# EAGLE board nanaPanelA (EAGLE 9.6.2), part 1 of 2
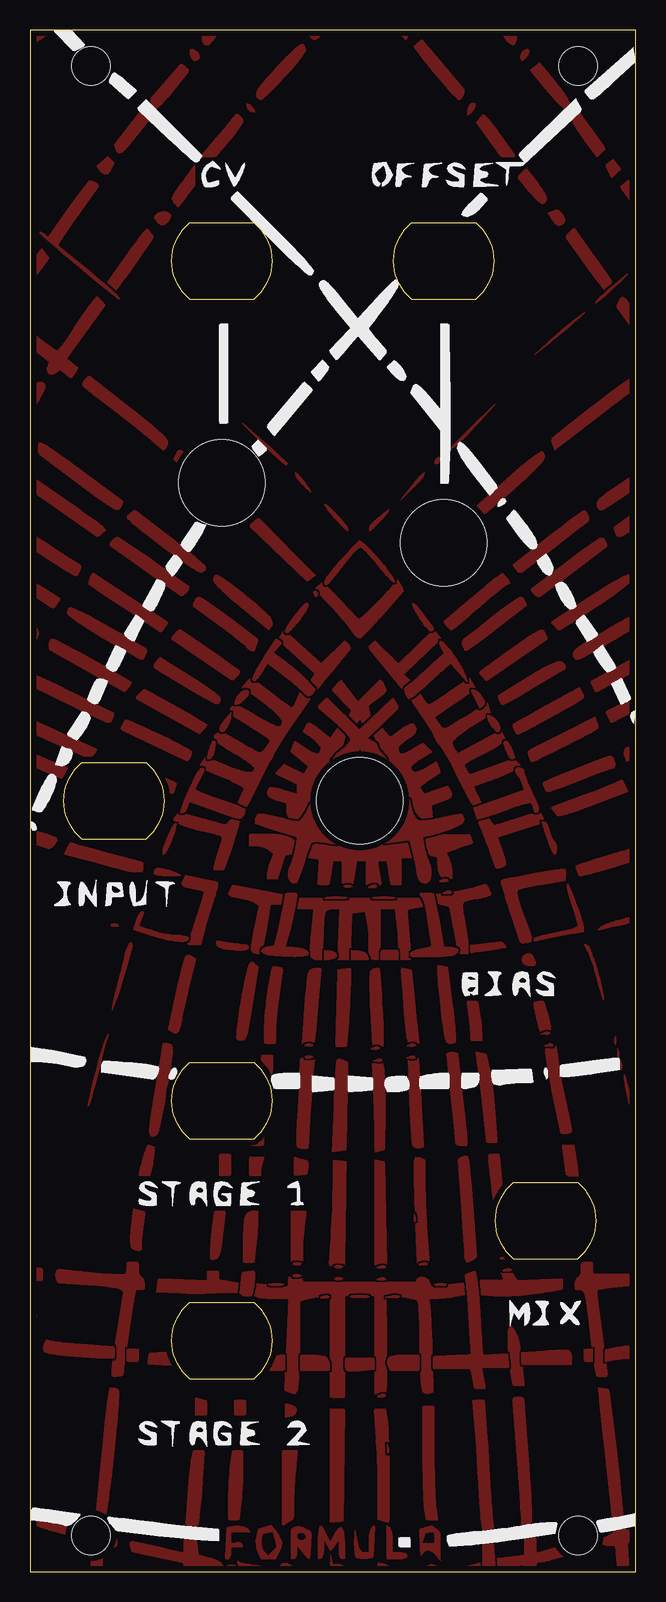
[diagram p0: board, top side]
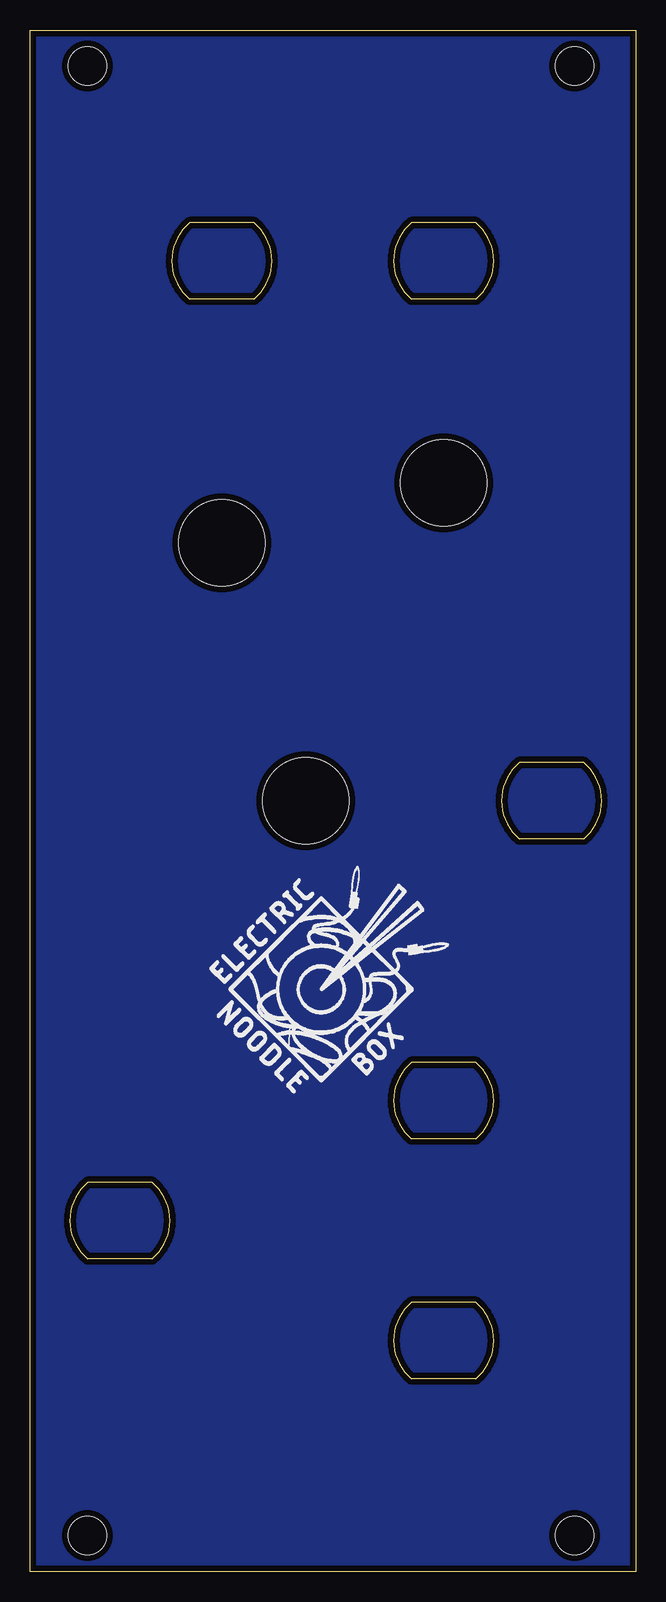
[diagram p1: board, bottom side, seen from below]

Size 50.5 x 128.5 mm. Coordinates in mm from the lower left corner, seen from the top.
Outline: 0,0 50.5,0 50.5,128.5 0,128.5 0,0
Copper layers (1*16): Top 0.035mm / dielectric 1.6mm / Bottom 0.035mm
Design rules "Elecrow_2-layer_PCB_eagle_rule": minimum track width 6mil, minimum drill 12mil, track to track 6mil, track to pad 6mil, pad to pad 6mil, via to via 8mil, smd to smd 0mil, copper to edge 20mil, drill to drill 10mil, minimum pad ring 6mil, minimum via ring 6mil, stop-mask expansion 0mil, vias tented up to drill 100mil, thermal gap 10mil
Holes 3.2 mm at 5.08,3 45.72,3 45.72,125.5 5.08,125.5

## Footprints (pad centres in the part's own frame; a part is rotated, then mirrored left to right if it is on the bottom)
ALPHA9MM_POT_CUTOUT = hole 7.2: 0,0

## Placement (x,y rotation side)
E$1  [CINCH_BANANA_CUTOUT]  16,109.25 90 top
E$2  [CINCH_BANANA_CUTOUT]  34.5,109.25 90 top
E$3  [CINCH_BANANA_CUTOUT]  7,64.25 90 top
E$4  [CINCH_BANANA_CUTOUT]  16,39.25 90 top
E$5  [CINCH_BANANA_CUTOUT]  16,19.25 90 top
E$6  [CINCH_BANANA_CUTOUT]  43,29.25 90 top
E$7  [ALPHA9MM_POT_CUTOUT]  16,90.75 0 top
E$8  [ALPHA9MM_POT_CUTOUT]  34.5,85.75 0 top
E$9  [ALPHA9MM_POT_CUTOUT]  27.5,64.25 0 top
E$10  [LOGO20X20]  35.56,39.37 0 bottom

## Library data of the parts
E$1-E$10 = ElectricNoodleBox

## Tracks (layer width: path | path; a pad name or v marks a point on that pad's centre or on a via)
AGND
  pour Bottom (rank 3): 0,0 50.5,0 50.5,128.5 0,128.5
GND
  pour Top (rank 3): 5.65,0.05 6.05,0.05 6.06,0.25 6.06,1.25 5.92,1.3 5.12,1.3 5.06,1.15 5.06,0.15 5.16,0.05 5.56,0.05
  pour Top (rank 3): 13.28,0.05 13.48,0.07 13.67,0.12 13.84,0.22 13.96,0.38 14.09,0.49 15.07,0.27 15.26,0.23 15.46,0.19 15.66,0.16 15.86,0.14 16.06,0.13 16.24,0.18 16.19,0.37 16.08,0.54 15.94,0.68 15.77,0.8 15.6,0.89 15.42,0.98 15.23,1.05 15.04,1.11 14.85,1.16 14.26,1.29 14.07,1.34 13.93,2.53 13.86,2.68 12.87,2.82 12.79,2.72 12.79,1.72 12.77,1.55 11.99,1.73 11.6,1.82 10.82,2 9.85,2.24 9.65,2.29 9.46,2.33 9.26,2.37 9.07,2.41 8.87,2.44 8.67,2.46 8.47,2.47 8.33,2.36 8.33,2.17 8.38,1.97 8.45,1.79 8.55,1.63 12.66,0.77 12.79,0.68 12.79,0.08 12.97,0.05 13.17,0.05
  pour Top (rank 3): 19.74,0.05 21.94,0.05 22.02,0.17 21.98,0.36 21.83,0.49 21.65,0.58 21.46,0.64 21.26,0.66 21.06,0.63 20.89,0.54 20.78,0.37 20.65,0.26 19.26,0.43 19.06,0.46 18.66,0.52 18.27,0.58 18.07,0.62 17.88,0.66 17.68,0.71 17.49,0.77 17.31,0.85 17.28,0.68 17.28,0.08 17.45,0.05 19.45,0.05
  pour Top (rank 3): 25.81,0.06 26,0.1 26.18,0.19 26.24,0.36 26.1,0.49 25.9,0.54 25.7,0.55 25.3,0.55 25.25,0.74 25.1,1.32 25.06,1.34 25.01,0.14 25.12,0.05 25.52,0.05
  pour Top (rank 3): 29.61,0.06 29.81,0.1 29.97,0.21 29.94,0.39 29.78,0.51 29.6,0.59 29.41,0.65 29.02,0.75 29,0.58 29,0.18 29.07,0.05 29.47,0.05
  pour Top (rank 3): 33.62,0.06 33.81,0.11 33.97,0.23 33.93,0.42 33.76,0.51 33.56,0.55 33.36,0.54 33.17,0.5 33.01,0.38 33.04,0.2 33.21,0.1 33.4,0.06
  pour Top (rank 3): 36.37,0.09 37.57,0.06 37.72,0.09 37.72,0.69 37.6,0.73 36.82,0.52 36.43,0.43 36.04,0.34 35.85,0.3 35.65,0.26 35.46,0.22 35.43,0.15 35.62,0.12 35.82,0.11 36.02,0.1 36.22,0.09
  pour Top (rank 3): 40.07,0.35 41.05,0.57 41.13,0.42 41.21,0.24 41.37,0.13 41.57,0.07 41.76,0.05 42.16,0.05 42.21,0.21 42.21,0.41 42.25,0.6 42.37,0.75 42.56,0.81 42.76,0.83 42.96,0.87 43.15,0.91 43.35,0.96 43.54,1 43.73,1.06 44.7,1.32 44.64,1.45 44.51,1.61 44.38,1.76 44.22,1.87 44.03,1.95 43.83,1.97 43.64,1.93 43.06,1.76 42.29,1.54 42.21,1.64 42.21,2.64 42.18,2.8 41.38,2.8 41.21,2.76 41.21,1.56 41.21,1.37 38.83,1.05 38.72,0.95 38.72,0.75 38.74,0.55 38.79,0.36 38.93,0.22 39.12,0.21 39.32,0.23 39.52,0.25 39.72,0.28 39.92,0.32
  pour Top (rank 3): 49.58,0.05 49.98,0.05 49.84,2.25 49.89,2.41 50.08,2.47 50.26,2.56 50.37,2.73 50.43,2.92 50.44,3.12 50.44,3.32 50.35,3.43 48.95,3.53 48.79,3.43 48.51,3.15 48.36,3.03 48.18,2.92 48,2.84 47.81,2.8 47.41,2.8 47.47,2.61 47.54,2.43 47.7,2.3 47.88,2.22 48.08,2.18 48.28,2.17 48.68,2.17 48.82,2.11 48.97,0.12 49.11,0.05 49.31,0.05
  pour Top (rank 3): 7.14,2.07 7.27,2.22 7.31,2.41 7.27,2.61 7.16,2.77 6.97,2.78 6.85,2.62 6.81,2.43 6.85,2.23 6.97,2.08
  pour Top (rank 3): 3.23,3.11 3.31,3.3 3.31,3.49 3.21,3.67 3.07,3.8 2.89,3.89 2.69,3.93 2.49,3.97 2.3,4.01 1.9,4.07 1.71,4.1 1.31,4.16 0.12,4.32 0.08,4.17 0.17,4.01 0.34,3.92 0.53,3.83 0.71,3.76 0.9,3.69 1.09,3.63 1.28,3.57 1.47,3.51 1.66,3.46 2.24,3.3 2.63,3.2 2.82,3.15 3.02,3.1
  pour Top (rank 3): 13.59,3.8 13.99,3.8 14.04,3.97 14.13,4.56 14.16,4.76 14.21,5.16 14.25,5.56 14.3,6.15 14.35,6.75 14.41,7.55 14.57,9.94 14.48,10.04 13.68,10.04 13.56,9.94 13.45,9.35 13.41,9.16 13.39,8.96 13.34,8.56 13.29,7.96 13.23,7.36 13.2,6.97 13.16,6.37 12.99,3.97 13.01,3.8 13.41,3.8
  pour Top (rank 3): 21.58,4.14 21.92,4.36 22.02,4.5 22.02,5.7 22.02,5.9 22.03,6.3 22.05,6.7 22.07,7.1 22.09,7.5 22.12,7.9 22.14,8.1 22.18,8.5 22.32,9.89 22.29,10.04 21.09,10.04 21.02,9.92 21.02,3.92 21.09,3.84 21.42,4.05
  pour Top (rank 3): 41.4,3.8 41.59,3.86 41.75,3.97 41.86,4.14 41.87,4.34 41.87,4.54 41.87,4.74 41.87,4.94 41.85,5.34 41.83,5.74 41.8,6.34 41.77,6.94 41.7,7.93 41.64,8.73 41.35,12.52 41.26,13.72 41.22,14.32 41.11,14.47 40.92,14.52 40.72,14.54 40.52,14.53 40.33,14.47 40.23,14.32 40.26,13.92 40.38,12.33 40.68,8.54 40.77,7.34 40.85,6.34 40.91,5.35 40.95,4.75 40.96,4.55 40.96,3.95 41.02,3.8 41.22,3.8
  pour Top (rank 3): 25.74,4.19 25.94,4.2 26.13,4.22 26.27,13.42 26.19,13.54 25.19,13.54 25.01,13.52 25.01,4.32 25.02,4.13 25.42,4.16
  pour Top (rank 3): 29.95,4.13 29.97,4.33 29.98,4.73 29.99,5.33 29.99,5.93 29.99,6.73 29.99,7.53 29.98,8.33 29.97,8.93 29.96,9.53 29.95,10.13 29.93,10.73 29.91,11.33 29.9,11.73 29.88,12.13 29.86,12.33 29.85,12.53 29.82,12.73 29.69,13.52 29.51,13.54 28.71,13.54 28.69,13.38 28.84,11.19 28.87,10.79 28.89,10.39 28.92,9.79 28.94,9.19 28.96,8.59 28.98,7.79 28.99,7.39 29,6.99 29,6.59 29,4.39 29.14,4.3 29.53,4.2 29.72,4.15 29.91,4.09
  pour Top (rank 3): 33.63,4.3 34.03,4.3 34.02,4.47 33.89,5.26 33.87,5.46 33.85,5.66 33.84,5.86 33.82,6.26 33.8,6.66 33.78,7.26 33.77,7.66 33.75,8.26 33.75,8.86 33.74,9.46 33.74,10.06 33.74,13.66 33.67,13.79 32.87,13.79 32.74,13.72 32.74,9.72 32.74,9.12 32.74,8.72 32.76,7.92 32.77,7.12 32.79,6.52 32.82,5.92 32.85,5.52 32.86,5.32 32.89,5.13 33.04,4.34 33.21,4.3 33.41,4.3
  pour Top (rank 3): 6.34,4.77 6.39,4.96 6.42,5.16 6.49,5.56 6.54,5.95 6.62,6.55 6.72,7.34 6.8,7.94 6.89,8.73 6.98,9.52 7.06,10.32 7.14,11.12 7.2,11.71 7.26,12.31 7.31,12.91 7.36,13.51 7.39,13.91 7.41,14.3 7.42,14.5 7.43,14.7 7.43,14.9 7.39,15.1 7.24,15.22 7.05,15.28 6.85,15.29 6.65,15.29 6.6,15.12 6.48,14.33 6.45,14.13 6.4,13.73 6.36,13.33 6.24,12.34 6.09,10.95 5.97,9.75 5.5,5.18 5.5,4.99 5.84,4.78 6.03,4.7 6.22,4.69
  pour Top (rank 3): 49.09,4.55 49.49,4.55 49.48,4.74 49.32,6.53 49.28,6.93 49.18,7.93 49.07,8.92 48.93,10.11 48.82,11.11 48.32,15.08 48.2,15.18 47.42,15.33 47.39,15.18 47.53,13.79 47.57,13.39 47.73,11.8 47.93,10.01 48.53,4.64 48.64,4.55 48.84,4.55
  pour Top (rank 3): 21.84,12.99 22.02,13.08 22.17,13.21 22.26,13.38 22.21,13.57 22.08,13.72 21.9,13.82 21.71,13.88 21.33,13.98 21.27,13.85 21.27,12.85 21.45,12.89 21.64,12.94
  pour Top (rank 3): 14.44,13.04 14.64,13.04 14.79,13.09 14.79,14.09 14.73,14.25 13.96,14.45 13.79,14.47 13.79,13.07 13.97,13.04 14.17,13.04
  pour Top (rank 3): 25.64,14.54 26.24,14.54 26.26,14.73 26.26,22.93 26.35,23.03 28.75,23.03 28.75,14.83 28.91,14.79 29.71,14.79 29.75,14.95 29.77,15.75 29.77,16.15 29.77,16.75 29.77,17.55 29.76,18.55 29.76,19.55 29.71,22.95 29.77,23.09 30.95,22.91 31.35,22.84 31.55,22.81 31.74,22.77 31.94,22.73 32.13,22.68 32.31,22.6 32.36,22.41 32.38,22.21 32.4,22.01 32.42,21.81 32.43,21.61 32.45,21.21 32.47,20.61 32.48,20.01 32.49,19.41 32.49,18.61 32.5,18.21 32.51,17.61 32.52,17.21 32.55,16.61 32.57,16.22 32.6,15.82 32.62,15.62 32.64,15.42 32.67,15.22 32.74,15.04 32.89,14.9 33.07,14.84 33.27,14.85 33.65,14.99 33.66,15.18 33.55,18.98 33.52,19.98 33.5,20.38 33.47,20.97 33.45,21.37 33.43,21.77 33.41,21.97 33.4,22.17 33.37,22.37 33.29,22.76 33.46,22.78 33.86,22.79 34.06,22.79 34.26,22.8 34.46,22.81 34.66,22.83 34.86,22.85 35.06,22.87 35.26,22.9 35.45,22.93 36.44,23.09 36.48,23.26 36.48,24.06 36.3,24.06 33.52,23.74 33.43,23.89 33.36,24.08 33.27,24.26 33.12,24.39 32.94,24.49 32.75,24.53 32.55,24.52 32.36,24.46 32.24,24.31 32.24,24.11 32.06,24.09 22.86,24.1 22.77,24.21 22.72,24.39 22.55,24.48 22.35,24.52 22.15,24.53 21.55,24.53 21.52,24.36 21.52,23.76 21.37,23.73 18.98,23.97 18.8,23.96 18.66,23.59 18.6,23.4 18.55,23.21 18.53,23.01 18.69,22.91 18.89,22.87 19.09,22.84 19.28,22.81 19.48,22.8 19.68,22.79 19.88,22.78 20.08,22.78 21.48,22.78 21.58,22.69 21.24,15.29 21.24,15.1 21.99,14.82 22.15,14.84 22.25,15.01 22.34,15.19 22.37,15.39 22.39,15.59 22.41,15.78 22.43,15.98 22.45,16.38 22.48,16.98 22.49,17.38 22.5,17.98 22.51,18.38 22.51,18.78 22.52,22.38 22.55,22.56 22.74,22.62 22.93,22.67 23.13,22.72 23.32,22.76 23.52,22.8 23.71,22.84 24.11,22.91 24.9,23.04 25.01,22.97 25.01,14.57 25.18,14.54 25.58,14.54
  pour Top (rank 3): 40.82,15.54 41.22,15.54 41.21,15.73 41.1,16.92 41.05,17.32 41.01,17.72 40.96,18.12 40.91,18.51 40.88,18.71 40.84,18.91 40.81,19.1 40.77,19.3 40.71,19.49 40.64,19.68 40.56,19.86 40.46,20.04 40.34,20.2 40.06,20.48 39.97,20.39 39.9,20.21 39.86,20.01 39.85,19.81 39.84,19.61 39.84,19.41 39.84,19.21 39.85,19.01 39.85,18.81 39.86,18.61 39.89,18.21 39.91,18.01 39.94,17.61 39.99,17.22 40.01,17.02 40.06,16.62 40.09,16.42 40.22,15.63 40.34,15.54 40.55,15.54
  pour Top (rank 3): 7.39,16.29 7.59,16.32 7.76,16.41 7.81,16.6 7.86,17 7.91,17.39 8.07,18.58 8.17,19.38 8.26,19.97 8.43,21.16 8.55,21.95 8.64,22.54 8.68,22.74 8.72,22.93 8.84,23.52 9.03,23.53 9.43,23.53 9.55,23.61 9.55,24.01 9.53,24.21 9.47,24.4 9.33,24.53 9.17,24.63 9.09,24.82 9.06,25.01 9.05,25.21 9.05,25.61 9.02,25.78 8.22,25.78 8.06,25.74 8.06,25.34 8.05,25.14 8.02,24.95 7.95,24.76 7.76,24.73 7.56,24.73 7.36,24.73 6.96,24.75 6.56,24.78 5.96,24.83 5.56,24.86 5.16,24.9 2.38,25.17 2.23,25.08 2.13,24.91 2.1,24.71 2.13,24.52 2.19,24.33 2.26,24.14 2.43,24.08 4.82,23.91 5.22,23.88 5.62,23.84 6.02,23.8 6.42,23.76 6.61,23.73 6.81,23.71 7.01,23.68 7.21,23.64 7.4,23.6 7.58,23.52 7.75,23.41 7.77,23.23 7.27,20.07 7.12,19.08 7.01,18.29 6.92,17.7 6.87,17.3 6.85,17.1 6.83,16.9 6.81,16.7 6.81,16.3 6.99,16.29 7.19,16.29
  pour Top (rank 3): 47.72,16.29 48.12,16.29 48.17,16.42 48.02,17.61 47.95,18.21 47.76,19.6 47.51,21.38 47.43,21.97 47.38,22.37 47.34,22.77 47.32,22.97 47.31,23.17 47.3,23.37 47.39,23.51 47.59,23.55 47.78,23.58 47.98,23.61 48.18,23.64 48.58,23.68 48.98,23.72 50.37,23.85 50.44,23.98 50.44,24.78 47.04,24.78 46.95,24.89 46.95,25.69 46.84,25.78 46.04,25.78 45.95,25.67 45.95,25.27 45.95,25.07 45.92,24.87 45.86,24.68 45.73,24.54 45.56,24.44 45.48,24.26 45.45,24.07 45.45,23.67 45.52,23.53 45.72,23.53 45.92,23.51 46.08,23.4 46.2,23.25 46.29,23.06 46.33,22.87 46.36,22.67 46.39,22.47 46.45,22.08 46.53,21.48 46.6,20.89 46.79,19.3 46.91,18.31 46.97,17.91 47.02,17.51 47.08,17.12 47.12,16.92 47.23,16.33 47.39,16.29 47.59,16.29
  pour Top (rank 3): 41.89,23.14 42.69,23.25 43.08,23.3 43.48,23.36 43.67,23.39 43.87,23.43 44.26,23.5 44.46,23.55 44.46,24.35 44.33,24.41 40.73,24.23 40.59,24.32 40.49,24.5 40.39,24.67 40.26,24.82 40.09,24.93 39.91,25 39.71,25.03 39.31,25.03 39.28,24.91 39.5,24.35 39.4,24.28 37.6,24.28 37.48,24.2 37.48,23.2 37.53,23.06 38.73,22.99 38.93,22.98 39.13,22.97 39.33,22.97 39.53,22.97 39.93,22.98 40.13,22.99 40.53,23.01 40.93,23.04 41.12,23.05 41.32,23.07 41.52,23.09
  pour Top (rank 3): 14.56,23.2 14.76,23.22 14.96,23.23 15.56,23.25 16.16,23.26 17.36,23.28 17.53,23.31 17.53,23.91 17.39,24 15.82,24.3 15.78,24.47 15.78,24.87 15.75,25.03 14.95,25.03 14.79,24.99 14.79,24.39 14.75,24.23 10.76,24.4 10.66,24.29 10.54,23.5 10.52,23.31 12.52,23.22 13.12,23.21 13.52,23.2 13.92,23.19 14.12,23.19 14.32,23.19 14.52,23.2
  pour Top (rank 3): 0.59,24.28 0.99,24.28 1.07,24.4 1.07,25.2 0.95,25.28 0.15,25.28 0.08,25.16 0.08,24.36 0.2,24.28 0.4,24.28
  pour Top (rank 3): 25.67,25.53 26.07,25.53 26.26,25.55 26.32,29.35 26.35,30.95 26.37,32.55 26.38,34.15 26.18,34.18 25.39,34.29 25.26,34.24 25.26,32.44 25.26,32.04 25.25,31.64 25.24,31.24 25.23,30.84 25.21,30.24 25.18,29.64 25.17,29.24 25.12,28.45 25.1,28.05 24.94,25.65 25.01,25.53 25.41,25.53
  pour Top (rank 3): 29.42,25.53 29.62,25.53 29.76,25.59 29.62,33.99 29.57,34.15 28.79,34.3 28.75,34.15 28.75,25.55 28.93,25.53 29.13,25.53
  pour Top (rank 3): 32.87,25.74 33.26,25.85 33.3,26.01 33.15,28.21 33.11,28.8 33.09,29.2 33.06,29.8 33.03,30.6 33.01,31.4 33,31.8 32.99,32.2 32.99,32.6 32.99,34.2 32.88,34.33 32.7,34.4 32.51,34.47 32.31,34.5 32.11,34.47 32.05,34.29 32.03,34.09 32.03,33.89 32.02,33.49 32.03,32.89 32.04,32.29 32.05,31.49 32.07,30.89 32.11,29.9 32.29,25.7 32.38,25.61 32.77,25.72
  pour Top (rank 3): 22.37,25.78 22.77,25.78 22.77,26.78 22.77,26.98 22.78,27.18 22.79,27.38 22.81,27.78 22.85,28.18 22.89,28.58 22.91,28.78 23.07,29.97 22.94,30.03 21.94,30.03 21.77,30 21.77,25.8 21.95,25.78 22.15,25.78
  pour Top (rank 3): 15.51,26.05 15.67,26.16 15.79,26.32 15.87,26.51 15.91,26.7 15.94,26.9 16,27.29 16.08,27.89 16.15,28.49 16.3,29.88 16.27,30.03 15.47,30.03 15.34,29.94 15.18,28.75 15.13,28.36 15.1,27.96 15.07,27.56 15.05,27.36 15.04,27.16 15.04,26.96 15.04,26.16 15.11,26.03 15.31,26.03
  pour Top (rank 3): 39.64,26.28 39.84,26.28 39.95,26.33 39.51,27 39.4,27.16 39.28,27.32 39.16,27.48 39.09,27.41 39.11,27.21 39.14,27.01 39.25,26.42 39.33,26.28 39.53,26.28
  pour Top (rank 3): 8.95,26.78 9.15,26.78 9.3,26.83 9.3,27.23 9.31,27.43 9.32,27.63 9.34,27.83 9.38,28.22 9.43,28.62 9.59,29.81 9.56,29.97 8.78,30.17 8.6,30.21 8.43,28.82 8.41,28.62 8.39,28.42 8.38,28.22 8.37,28.02 8.36,27.82 8.36,27.62 8.36,27.42 8.38,27.22 8.43,27.03 8.57,26.9 8.75,26.81
  pour Top (rank 3): 39.15,30.47 39.42,31.23 39.48,31.41 39.19,34.6 39.14,34.77 38.34,34.77 38.22,34.69 38.22,34.49 38.23,34.29 38.24,34.09 38.26,33.89 38.3,33.5 38.35,33.1 38.42,32.5 38.52,31.71 38.81,29.53 39.08,30.28
  pour Top (rank 3): 45.73,32.54 45.75,32.73 45.75,32.93 45.74,33.13 45.72,33.33 45.7,33.53 45.67,33.73 45.64,33.93 45.39,35.51 45.2,35.52 44.4,35.52 44.41,35.33 44.71,33.15 44.86,33.03 45.19,32.8 45.35,32.69 45.53,32.59
  pour Top (rank 3): 9.63,33.02 10.03,33.02 10.08,33.21 10.17,33.6 10.22,33.79 10.25,33.99 10.29,34.18 10.32,34.38 10.34,34.58 10.37,34.78 10.41,35.18 10.39,35.35 9.83,35.55 9.74,35.4 9.6,35.02 9.54,34.83 9.48,34.64 9.42,34.45 9.36,34.26 9.3,34.07 9.25,33.88 9.2,33.68 9.06,33.1 9.17,33.02 9.37,33.02
  pour Top (rank 3): 16.46,33.02 16.66,33.02 16.78,33.1 16.78,34.7 16.65,34.77 15.85,34.77 15.78,34.64 15.78,33.04 15.97,33.02 16.17,33.02
  pour Top (rank 3): 22.76,33.1 22.96,33.12 23.14,33.17 23.23,33.76 23.23,33.96 23.18,34.16 23.04,34.27 22.84,34.3 22.65,34.35 22.46,34.41 22.08,34.55 22.02,34.45 22.02,33.05 22.16,33.01 22.56,33.07
  pour Top (rank 3): 25.98,35.09 26.37,35.15 26.38,35.34 26.52,42.34 26.44,42.49 26.07,42.63 25.88,42.68 25.68,42.7 25.56,42.58 25.53,42.38 25.52,42.18 25.49,41.78 25.46,41.38 25.44,40.98 25.4,40.39 25.36,39.39 25.33,38.79 25.19,34.99 25.38,35.01 25.77,35.06
  pour Top (rank 3): 29.29,35.09 29.49,35.13 29.62,35.22 29.64,38.42 29.63,38.82 29.63,39.42 29.62,40.22 29.6,40.82 29.59,41.22 29.58,41.42 29.56,41.62 29.54,41.82 29.46,42.41 29.35,42.52 28.55,42.52 28.53,42.34 28.61,40.74 28.62,40.35 28.66,39.35 28.68,38.55 28.7,37.95 28.71,37.35 28.75,35.15 28.79,34.99 29.18,35.07
  pour Top (rank 3): 22.87,35.27 23.07,35.27 23.22,35.33 23.39,38.32 23.46,39.32 23.52,40.12 23.58,40.92 23.62,41.31 23.64,41.51 23.66,41.71 23.79,42.7 23.66,42.77 22.66,42.77 22.51,42.71 22.49,41.51 22.48,41.31 22.47,40.91 22.43,40.11 22.39,39.31 22.34,38.51 22.28,37.51 22.26,37.11 22.24,36.71 22.22,36.31 22.22,35.91 22.22,35.71 22.22,35.51 22.3,35.35 22.49,35.3 22.69,35.27
  pour Top (rank 3): 32.49,35.33 32.69,35.37 32.84,35.44 32.78,37.04 32.75,37.64 32.7,38.44 32.66,39.24 32.61,40.04 32.44,42.63 32.36,42.77 31.56,42.77 31.5,42.63 31.64,39.23 31.69,38.23 31.73,37.43 31.77,36.84 31.81,36.24 31.83,36.04 31.85,35.84 31.87,35.64 31.95,35.46 32.11,35.35 32.3,35.31
  pour Top (rank 3): 38.73,35.77 38.93,35.77 39,35.89 38.82,38.28 38.79,38.68 38.73,39.28 38.68,39.68 38.63,40.07 38.55,40.67 38.49,41.06 38.46,41.26 38.42,41.46 38.39,41.65 38.09,43.02 37.98,43.16 37.2,43.31 37.18,43.16 37.32,42.17 37.35,41.97 37.43,41.38 37.52,40.58 37.64,39.59 37.72,38.8 38.04,35.81 38.21,35.77 38.41,35.77
  pour Top (rank 3): 10.3,36.27 10.49,36.34 10.64,36.47 10.73,36.65 10.78,36.84 10.83,37.04 10.87,37.23 10.91,37.43 11,37.82 11.11,38.41 11.26,39.19 11.41,39.98 11.54,40.77 11.64,41.36 11.73,41.95 11.81,42.55 11.86,42.94 11.88,43.14 11.9,43.34 11.91,43.54 11.91,43.74 11.8,43.9 11.62,43.98 11.42,44.01 11.22,44.01 11.06,43.97 10.93,43.18 10.8,42.39 10.26,39.24 10.17,38.64 10.11,38.25 10.06,37.85 10.03,37.65 9.98,37.26 9.96,37.06 9.95,36.86 9.94,36.66 9.96,36.46 10.11,36.33 10.3,36.27
  pour Top (rank 3): 44.87,36.53 45.07,36.58 45.2,36.71 45.17,36.91 45.09,37.3 44.93,38.08 44.68,39.26 44.59,39.65 44.52,40.04 44.44,40.43 44.33,41.02 44.22,41.61 44.15,42.01 44.12,42.21 44.09,42.4 43.93,43.59 43.88,43.77 43.48,43.77 43.29,43.75 43.1,43.67 42.98,43.52 42.97,43.32 42.99,43.12 43.01,42.92 43.04,42.73 43.1,42.33 43.2,41.74 43.27,41.35 43.38,40.76 43.53,39.97 43.65,39.38 43.81,38.6 44.23,36.64 44.33,36.52 44.53,36.52
  pour Top (rank 3): 26.09,43.77 26.29,43.77 26.44,43.82 26.59,45.81 26.62,46.21 26.65,46.61 26.68,47.21 26.7,47.61 26.73,48.21 26.74,48.61 26.75,49.01 26.75,50.21 26.64,50.28 25.65,50.14 25.63,49.95 25.5,43.95 25.5,43.77 25.9,43.77
  pour Top (rank 3): 29.12,43.77 29.32,43.77 29.5,43.79 29.5,44.79 29.49,44.99 29.49,45.19 29.47,45.59 29.43,46.39 29.4,46.99 29.37,47.39 29.33,47.99 29.18,50.18 29.05,50.26 28.85,50.26 28.66,50.22 28.48,50.12 28.36,49.97 28.33,49.77 28.32,49.57 28.32,49.37 28.32,49.17 28.32,48.97 28.32,48.57 28.34,47.97 28.35,47.57 28.37,47.17 28.39,46.77 28.57,43.78 28.76,43.77 28.96,43.77
  pour Top (rank 3): 23.35,44.01 23.55,44.01 23.72,44.05 23.88,45.44 23.94,46.04 24,46.64 24.07,47.44 24.12,48.03 24.3,50.23 24.14,50.26 23.94,50.26 23.74,50.26 23.54,50.21 23.36,50.12 23.22,49.99 23.16,49.8 23.13,49.6 23.1,49.4 23.06,49 23,48.41 22.95,47.81 22.9,47.01 22.7,44.02 22.9,44.01 23.1,44.01
  pour Top (rank 3): 32.15,44.01 32.35,44.01 32.49,44.07 32.33,45.46 32.2,46.66 32.06,48.05 31.87,50.04 31.76,50.15 30.97,50.3 30.94,50.16 31.13,47.36 31.19,46.57 31.22,46.17 31.26,45.77 31.3,45.37 31.32,45.17 31.35,44.97 31.38,44.78 31.41,44.58 31.5,44.19 31.57,44.01 31.97,44.01
  pour Top (rank 3): 17.82,44.32 17.97,44.45 18.07,44.63 18.13,44.82 18.17,45.01 18.28,45.6 18.38,46.19 18.51,46.98 18.64,47.77 19.02,50.14 19.05,50.34 18.62,50.76 18.48,50.81 18.34,50.67 18.23,50.51 18.16,50.32 18.1,50.13 18.05,49.94 18.01,49.74 17.92,49.35 17.84,48.96 17.76,48.57 17.65,47.98 17.59,47.58 17.49,46.99 17.4,46.4 17.35,46 17.29,45.6 17.25,45.21 17.23,45.01 17.21,44.81 17.2,44.61 17.23,44.42 17.4,44.31 17.59,44.27
  pour Top (rank 3): 37.32,44.26 37.72,44.26 37.72,44.66 37.72,44.86 37.71,45.06 37.69,45.26 37.67,45.46 37.63,45.86 37.58,46.26 37.42,47.45 37.27,47.51 36.47,47.51 36.43,47.38 36.59,46.19 36.64,45.79 36.68,45.39 36.7,45.19 36.72,44.99 36.73,44.8 36.73,44.4 36.8,44.26 37.2,44.26
  pour Top (rank 3): 12.42,45.07 12.49,45.26 12.54,45.45 12.59,45.64 12.63,45.84 12.67,46.04 12.71,46.23 12.79,46.62 12.92,47.21 13.05,47.79 13.15,48.18 13.29,48.77 13.82,50.9 13.83,51.08 13.49,51.29 13.3,51.36 13.1,51.36 12.95,51.25 12.87,51.06 12.81,50.87 12.76,50.68 12.65,50.29 12.56,49.9 12.46,49.51 12.33,48.93 12.24,48.54 12.16,48.15 11.54,45.21 11.67,45.09 11.84,44.99 12.02,44.9 12.22,44.88
  pour Top (rank 3): 43.13,45.03 43.32,45.1 43.45,45.24 43.44,45.44 43.41,45.64 43.36,45.83 43.31,46.03 43.26,46.22 43.21,46.41 43.15,46.61 42.92,47.37 42.83,47.51 42.43,47.51 42.23,47.5 42.03,47.45 41.98,47.28 42.01,47.09 42.06,46.89 42.15,46.5 42.24,46.11 42.49,45.14 42.59,45.01 42.99,45.01
  pour Top (rank 3): 41.76,50.51 41.96,50.52 42.16,50.57 42.19,50.73 42.13,50.93 42.06,51.11 41.96,51.29 41.82,51.42 41.63,51.5 41.44,51.49 41.25,51.41 41.1,51.28 41.03,51.09 41.04,50.9 41.12,50.72 41.29,50.61 41.48,50.54 41.67,50.51
  pour Top (rank 3): 24.13,51.01 24.33,51.01 24.41,51.13 24.46,52.93 24.47,53.13 24.48,53.53 24.51,53.93 24.52,54.13 24.54,54.33 24.56,54.53 24.58,54.73 24.62,54.92 24.71,55.09 24.89,55.19 25.08,55.24 25.28,55.25 25.68,55.26 25.8,55.18 25.64,51.18 25.66,51.01 26.66,51.01 26.74,51.13 26.87,54.73 26.93,54.89 27.92,55.03 27.98,54.87 28.11,54.08 28.14,53.88 28.17,53.69 28.19,53.49 28.21,53.29 28.23,53.09 28.24,52.89 28.25,52.69 28.25,52.49 28.24,52.29 28.23,52.09 28.22,51.89 28.22,51.69 28.22,51.49 28.23,51.29 28.34,51.13 28.52,51.04 28.72,51.01 29.12,51.01 29.25,51.08 29.25,55.08 29.27,55.25 30.27,55.25 30.43,55.21 30.6,53.82 30.64,53.42 30.67,53.02 30.7,52.62 30.73,52.22 30.74,52.02 30.74,51.82 30.74,51.02 30.93,51.01 31.73,51.01 31.8,51.13 31.48,55.11 31.59,55.21 32.97,55.49 32.99,55.63 32.86,56.01 32.72,56.09 22.32,56.13 22.25,55.96 22.1,55.38 22.13,55.26 23.53,55.26 23.66,55.19 23.46,53.4 23.44,53.2 23.41,52.8 23.38,52.4 23.37,52.2 23.36,52 23.35,51.8 23.36,51.6 23.37,51.4 23.44,51.22 23.6,51.1 23.79,51.03
  pour Top (rank 3): 19.03,51.51 19.23,51.51 19.3,51.68 19.5,52.45 19.55,52.65 19.59,52.84 19.64,53.04 19.72,53.43 19.79,53.82 19.86,54.22 19.89,54.41 20.06,55.6 20.2,55.66 21,55.63 21.14,55.7 21.26,56.29 21.2,56.41 17.07,57.19 16.89,57.19 16.79,57.02 16.68,56.85 16.59,56.67 16.54,56.48 16.68,56.35 16.87,56.28 17.06,56.23 17.25,56.18 17.65,56.11 17.84,56.07 18.04,56.02 18.23,55.97 18.42,55.91 18.61,55.84 18.79,55.75 18.96,55.64 19.12,55.53 18.7,53.58 18.62,53.19 18.55,52.79 18.51,52.6 18.48,52.4 18.46,52.2 18.44,52 18.43,51.8 18.51,51.63 18.69,51.54 18.88,51.51
  pour Top (rank 3): 36.4,51.51 36.6,51.51 36.74,51.56 36.53,52.74 36.25,54.32 36.22,54.51 36.19,54.71 36.16,54.91 36.14,55.11 36.12,55.31 36.1,55.51 36.1,55.71 36.22,55.85 36.41,55.92 36.6,55.97 36.8,56.02 36.99,56.06 37.19,56.09 37.39,56.12 37.59,56.16 37.78,56.19 37.98,56.24 38.17,56.29 38.36,56.36 38.46,56.51 38.4,56.69 38.31,56.87 38.2,57.04 38.1,57.21 37.95,57.29 37.19,57.04 37,56.99 36.81,56.94 36.61,56.89 36.42,56.85 36.03,56.77 35.63,56.69 35.43,56.66 35.24,56.63 35.04,56.61 33.85,56.45 33.72,56.37 33.76,56.18 33.8,55.98 33.91,55.81 34.06,55.69 34.24,55.6 34.43,55.55 34.83,55.49 34.97,55.4 35.27,53.83 35.42,53.05 35.58,52.26 35.7,51.67 35.77,51.51 36.17,51.51
  pour Top (rank 3): 13.82,52.26 14.22,52.26 14.31,52.4 14.55,53.37 14.66,53.76 14.77,54.14 14.94,54.72 15.06,55.1 15.18,55.48 15.36,56.05 15.42,56.24 15.53,56.63 15.59,56.82 15.64,57.01 15.68,57.21 15.71,57.41 15.53,57.48 15.33,57.53 15.14,57.58 14.94,57.62 14.75,57.66 14.36,57.74 12.98,58 12.86,57.86 12.76,57.69 12.68,57.51 12.66,57.31 12.77,57.16 12.95,57.08 13.14,57.02 13.34,56.97 13.53,56.92 13.92,56.84 14.12,56.8 14.31,56.75 14.51,56.69 14.49,56.52 14.44,56.33 14.26,55.75 14.01,54.99 13.15,52.33 13.26,52.26 13.66,52.26
  pour Top (rank 3): 41.54,52.45 41.93,52.56 41.94,52.7 41.79,53.07 41.71,53.25 41.5,53.81 41.3,54.38 41.03,55.13 40.96,55.32 40.9,55.51 40.84,55.7 40.79,55.9 40.74,56.09 40.7,56.28 40.67,56.48 40.65,56.68 40.73,56.85 40.92,56.92 41.11,56.97 41.3,57.02 41.5,57.07 41.69,57.11 42.08,57.19 42.28,57.22 42.67,57.29 44.65,57.61 44.71,57.76 44.71,58.36 44.65,58.5 44.25,58.5 44.05,58.5 43.85,58.47 43.65,58.45 43.26,58.39 42.86,58.33 42.27,58.22 41.88,58.15 41.48,58.07 40.7,57.91 40.11,57.79 39.72,57.71 39.53,57.67 39.33,57.62 39.28,57.47 39.33,57.28 39.38,57.08 39.44,56.89 39.55,56.51 39.66,56.12 39.84,55.55 40.02,54.98 40.21,54.41 40.4,53.84 40.59,53.27 40.78,52.7 40.85,52.51 41,52.4 41.2,52.39 41.4,52.42
  pour Top (rank 3): 24.62,57.25 24.82,57.25 24.97,57.31 25.27,59.08 25.33,59.25 25.93,59.25 26.01,59.13 26.01,57.33 26.13,57.25 26.93,57.25 26.97,57.44 27.25,59.22 27.43,59.25 27.83,59.25 28,59.23 28,57.43 28.03,57.25 29.23,57.25 29.29,57.37 29.01,59.15 29.09,59.25 29.69,59.25 29.76,59.11 30.05,57.33 30.18,57.25 30.98,57.25 30.99,57.44 30.99,59.44 31.13,59.5 31.93,59.5 32.01,59.59 31.87,59.96 31.81,60.15 31.76,60.34 31.74,60.54 31.72,60.72 29.92,60.58 29.13,60.52 28.73,60.5 28.33,60.48 27.93,60.46 27.73,60.45 27.53,60.45 27.33,60.46 26.93,60.48 26.33,60.52 25.53,60.58 23.34,60.75 23.29,60.57 23.1,59.59 23.23,59.51 24.02,59.39 24.12,59.29 23.98,57.29 24.13,57.25 24.33,57.25
  pour Top (rank 3): 20.27,57.75 20.67,57.75 20.74,57.92 21.26,59.65 21.38,59.75 21.58,59.75 21.77,59.8 21.92,59.93 22.03,60.1 22.1,60.29 22.25,60.87 22.07,60.94 21.9,61.03 21.87,61.22 21.74,61.32 21.54,61.35 21.34,61.37 21.14,61.39 20.94,61.41 20.74,61.42 20.54,61.42 20.34,61.43 20.14,61.43 18.34,61.44 18.28,61.31 18.28,60.51 18.47,60.5 18.87,60.5 19.07,60.48 19.27,60.44 19.46,60.38 19.64,60.31 19.82,60.21 19.98,60.1 20.3,59.86 20.02,59.11 19.95,58.92 19.89,58.73 19.84,58.54 19.8,58.34 19.77,58.14 19.77,57.94 19.78,57.75 20.18,57.75
  pour Top (rank 3): 34.93,57.75 35.13,57.75 35.23,57.85 35.23,58.25 35.22,58.45 35.18,58.65 35.14,58.84 35.09,59.03 35.04,59.23 34.97,59.41 34.83,59.79 34.78,59.96 35.53,60.24 35.91,60.38 36.29,60.51 36.48,60.57 36.86,60.7 36.94,60.81 36.72,61.37 36.57,61.44 34.97,61.41 34.77,61.4 34.57,61.39 34.37,61.38 34.17,61.36 33.97,61.34 33.78,61.32 33.58,61.29 33.38,61.25 33.19,61.19 33.04,61.07 32.96,60.89 32.92,60.69 32.91,60.49 32.94,60.3 33.02,60.11 33.13,59.94 33.27,59.8 33.44,59.7 33.63,59.64 33.82,59.59 33.98,59.52 33.98,59.12 33.99,58.92 34.01,58.72 34.04,58.52 34.08,58.32 34.14,58.13 34.25,57.97 34.41,57.85 34.6,57.77
  pour Top (rank 3): 11.57,58.02 12.57,58.04 12.57,58.07 11.63,58.42 11.44,58.48 11.25,58.54 11.06,58.58 10.86,58.62 10.66,58.63 10.48,58.58 10.35,58.42 10.3,58.23 10.46,58.12 10.65,58.08 10.85,58.05 11.05,58.03 11.25,58.02 11.45,58.02
  pour Top (rank 3): 46.6,58.16 46.8,58.2 47.18,58.3 47.57,58.41 48.15,58.57 48.72,58.74 50.25,59.21 50.44,59.27 50.44,59.67 50.44,59.87 50.4,60.07 50.3,60.24 50.11,60.22 49.92,60.17 49.72,60.12 49.34,60.01 48.76,59.85 47.99,59.62 47.23,59.38 46.66,59.2 46.28,59.07 46.09,59 45.53,58.79 45.51,58.65 45.72,58.09 45.85,57.99 46.43,58.12
  pour Top (rank 3): 9.1,58.35 9.3,58.37 9.43,58.45 9.43,59.05 9.28,59.14 6.57,59.85 5.99,60 5.22,60.21 4.45,60.42 4.07,60.54 3.88,60.6 3.5,60.72 3.33,60.74 2.86,59.85 2.97,59.77 5.1,59.22 5.87,59.01 6.45,58.86 7.03,58.7 7.41,58.59 7.8,58.48 7.99,58.44 8.19,58.4 8.39,58.37 8.59,58.34 8.79,58.33
  pour Top (rank 3): 15.8,58.5 16.2,58.5 16.28,58.68 16.81,60.19 16.94,60.57 17.12,61.14 17.24,61.52 17.29,61.71 17.34,61.9 17.39,62.1 17.52,62.68 17.36,62.76 17.17,62.82 16.98,62.8 16.8,62.71 16.65,62.57 16.42,62.25 16.25,62.23 12.59,63.23 12.41,63.22 11.99,62.79 12,62.66 12.32,62.42 12.49,62.31 12.67,62.23 12.86,62.16 13.04,62.09 13.24,62.03 13.43,61.97 13.62,61.92 13.81,61.87 14.01,61.82 14.2,61.78 14.59,61.69 14.79,61.65 14.98,61.61 15.18,61.56 15.37,61.5 15.56,61.45 15.75,61.38 15.94,61.3 16.03,61.15 15.98,60.96 15.93,60.77 15.86,60.58 15.8,60.39 15.73,60.2 15.67,60.01 15.61,59.82 15.56,59.63 15.5,59.43 15.45,59.24 15.31,58.66 15.32,58.5 15.72,58.5
  pour Top (rank 3): 39.38,58.73 39.56,58.81 39.71,58.95 39.69,59.15 39.64,59.34 39.58,59.53 39.52,59.72 39.4,60.1 39.07,61.04 39.02,61.22 41.49,62.02 42.45,62.32 42.83,62.44 42.93,62.55 42.85,62.73 42.78,62.92 42.67,63.08 42.51,63.21 42.32,63.25 42.13,63.21 41.93,63.16 41.74,63.11 41.35,63 41.16,62.94 40.78,62.83 40.4,62.7 38.88,62.21 38.7,62.18 38.1,62.99 37.93,62.88 37.43,62.56 37.4,62.41 37.71,61.67 37.78,61.49 37.93,61.12 38.07,60.74 38.21,60.37 38.35,59.99 38.81,58.67 38.95,58.61 39.14,58.66
  pour Top (rank 3): 1.62,60.27 1.8,60.36 1.95,60.49 2.08,60.64 2.2,60.8 2.29,60.98 2.23,61.13 2.04,61.21 1.86,61.28 1.67,61.35 1.48,61.42 1.29,61.48 1.1,61.54 0.91,61.6 0.72,61.66 0.52,61.71 0.33,61.75 0.16,61.66 0.1,61.47 0.08,61.27 0.08,60.87 0.19,60.75 0.94,60.48 1.13,60.41 1.32,60.35 1.51,60.29
  pour Top (rank 3): 22.27,62.51 22.45,62.6 22.52,62.78 22.6,62.96 22.71,63.13 22.83,63.29 22.96,63.44 23.1,63.58 23.22,63.74 23.33,63.91 23.41,64.09 23.44,64.29 23.4,64.49 23.43,64.68 23.52,64.86 23.65,65.01 23.79,65.15 23.91,65.31 23.99,65.5 24.02,65.69 24.11,65.87 24.25,66.01 24.43,66.1 24.6,66.21 24.72,66.36 24.73,66.56 24.75,66.75 24.8,66.95 24.86,67.14 24.91,67.33 24.95,67.53 24.98,67.73 25.08,67.89 25.24,68.01 25.43,68.09 25.81,68.21 25.92,68.35 26.4,69.88 26.37,70.05 25.91,70.43 25.77,70.46 25.08,69.48 24.94,69.51 24.17,70.15 24.02,70.28 23.86,70.4 23.69,70.51 23.53,70.62 23.35,70.72 23.16,70.7 23.02,70.56 22.93,70.38 22.79,70.01 23.44,69.54 23.6,69.43 23.76,69.3 23.9,69.16 24.04,69.02 24.16,68.86 24.25,68.68 24.25,68.48 24.18,68.3 24.05,68.14 23.86,68.15 23.67,68.22 23.49,68.31 23.31,68.4 23.14,68.5 22.97,68.61 22.15,69.17 22.03,69.13 21.74,68.39 21.87,68.25 23.1,67.22 23.23,67.09 22.91,66.58 22.79,66.47 21.37,67.2 21.2,67.28 20.49,66.57 20.57,66.47 22.19,65.69 22.27,65.54 22.27,64.94 22.21,64.81 21.06,65.16 20.87,65.21 20.67,65.26 20.48,65.3 20.28,65.33 20.08,65.34 19.9,65.29 19.82,65.11 19.78,64.91 19.82,64.72 19.96,64.58 20.13,64.47 20.31,64.39 20.5,64.32 20.69,64.27 21.27,64.12 21.39,64.01 21.4,63.41 21.42,63.22 21.46,63.02 21.53,62.83 21.66,62.68 21.83,62.59 22.02,62.53
  pour Top (rank 3): 33.3,62.58 33.49,62.62 33.6,62.72 33.5,63.72 33.5,63.9 34.44,64.24 34.63,64.32 34.81,64.4 34.99,64.49 35.15,64.6 35.21,64.78 35.15,64.96 35.05,65.14 34.95,65.31 34.84,65.47 32.95,64.82 32.8,64.89 32.59,65.22 32.51,65.39 32.98,65.76 33.14,65.88 33.3,66 33.46,66.12 33.63,66.23 33.8,66.34 34.14,66.54 34.25,66.67 33.96,67.41 33.84,67.46 32.98,66.95 32.8,66.86 32.62,66.77 32.44,66.7 32.24,66.64 32.05,66.61 31.88,66.71 31.77,66.88 31.76,67.07 31.88,67.23 32.02,67.36 32.18,67.49 32.34,67.6 32.51,67.71 32.68,67.82 33.37,68.22 33.51,68.33 32.8,69.04 32.63,68.97 31.95,68.55 31.78,68.44 31.61,68.35 31.42,68.26 31.24,68.19 31.04,68.14 30.87,68.21 30.79,68.39 30.75,68.58 30.79,68.78 30.9,68.94 31.04,69.08 31.2,69.21 31.36,69.32 31.53,69.43 31.7,69.54 31.85,69.66 32,69.79 32.14,69.94 32.23,70.12 32.21,70.31 32.12,70.49 31.97,70.63 31.78,70.63 31.59,70.57 31.41,70.48 31.23,70.38 31.06,70.28 30.9,70.16 30.11,69.55 29.96,69.61 29.29,70.35 29.16,70.48 28.54,69.97 28.59,69.8 28.78,69.45 28.87,69.28 28.95,69.09 29.01,68.9 29.04,68.7 29.03,68.5 29.08,68.32 29.26,68.24 29.43,68.13 29.57,67.98 29.7,67.83 29.82,67.68 29.94,67.52 30.06,67.35 30.17,67.18 30.38,66.85 30.48,66.67 30.69,66.33 30.89,65.99 30.99,65.81 31.18,65.46 31.28,65.29 31.37,65.11 31.45,64.93 31.53,64.74 31.61,64.56 31.68,64.37 31.73,64.18 31.76,63.98 31.84,63.8 31.94,63.63 32.05,63.46 32.17,63.3 32.3,63.14 32.44,63 32.59,62.87 32.75,62.75 32.92,62.65 33.11,62.58
  pour Top (rank 3): 44.79,63.16 44.98,63.22 45.17,63.28 45.54,63.41 46.11,63.61 46.67,63.82 47.42,64.1 49.85,65.03 49.87,65.16 49.49,65.87 49.37,65.97 48.46,65.58 48.27,65.5 47.9,65.35 47.53,65.21 46.97,64.99 46.59,64.85 46.22,64.72 45.46,64.45 44.9,64.25 44.33,64.04 43.96,63.9 43.59,63.75 43.47,63.65 43.98,63.04 44.15,62.99 44.54,63.09
  pour Top (rank 3): 18.01,63.59 18.11,63.77 18.2,63.94 18.48,64.48 18.84,65.19 19.37,66.26 19.64,66.8 19.83,67.15 20.11,67.69 20.3,68.04 20.49,68.39 20.68,68.74 20.78,68.91 20.89,69.08 21,69.25 21.32,69.75 21.65,70.25 22.21,71.09 23.33,72.74 23.23,72.88 22.66,73.45 22.55,73.43 22.25,72.69 22.17,72.51 22.08,72.33 21.98,72.15 21.86,71.99 21.69,72.08 21.52,72.2 21.36,72.31 20.87,72.66 20.55,72.9 20.23,73.14 18.48,74.47 18.33,74.4 17.77,73.83 17.68,73.69 18.03,73.5 18.2,73.39 18.37,73.28 18.53,73.16 18.85,72.93 19.33,72.56 19.64,72.32 19.8,72.19 19.96,72.07 20.11,71.94 20.26,71.8 20.4,71.67 20.55,71.53 20.68,71.38 20.81,71.23 20.93,71.07 21.02,70.89 21,70.69 20.92,70.51 20.77,70.39 20.58,70.43 20.39,70.5 20.21,70.59 20.03,70.67 19.85,70.76 19.68,70.86 19.5,70.96 19.33,71.05 19.15,71.16 18.81,71.36 18.47,71.57 18.12,71.76 17.94,71.86 17.77,71.95 17.59,72.04 17.41,72.13 17.22,72.2 17.03,72.22 16.86,72.12 16.73,71.96 16.66,71.78 16.59,71.59 16.68,71.46 18.4,70.44 18.57,70.33 18.91,70.12 19.24,69.9 19.41,69.79 19.57,69.68 19.74,69.56 19.89,69.43 20.01,69.28 19.94,69.1 19.84,68.92 19.73,68.76 19.61,68.6 19.48,68.45 19.32,68.32 19.14,68.25 18.96,68.32 18.78,68.41 18.6,68.5 18.42,68.59 18.07,68.79 17.9,68.88 17.55,69.08 16,70 15.82,69.96 15.63,69.89 15.46,69.79 15.35,69.63 15.35,69.43 15.47,69.27 15.63,69.14 15.78,69.02 15.95,68.9 16.11,68.79 16.28,68.68 16.45,68.57 16.62,68.47 16.79,68.37 17.31,68.06 17.48,67.96 17.65,67.86 17.82,67.75 17.99,67.64 18.15,67.53 18.31,67.41 18.47,67.29 18.62,67.16 18.73,67 18.69,66.8 18.55,66.66 18.37,66.59 18.17,66.6 17.97,66.64 17.78,66.69 17.59,66.74 17.39,66.8 17.2,66.86 17.02,66.92 16.83,66.99 16.64,67.06 16.46,67.14 16.27,67.22 14.61,67.91 14.5,67.75 14.19,67.24 14.11,67.08 15.95,66.29 16.31,66.13 16.68,65.96 17.04,65.79 17.22,65.7 17.39,65.61 17.57,65.51 17.72,65.39 17.86,65.25 17.28,63.98 17.37,63.85 17.71,63.63 17.88,63.53
  pour Top (rank 3): 37.41,63.75 37.61,63.78 37.72,63.92 37.65,64.11 37.57,64.29 37.49,64.47 37.4,64.65 37.03,65.36 37.07,65.49 38.21,65.88 38.39,65.94 38.58,66.01 38.77,66.09 38.95,66.16 39.32,66.31 39.51,66.39 39.69,66.47 39.87,66.56 40.05,66.65 40.23,66.74 40.93,67.12 40.91,67.23 40.29,67.74 36.73,66.42 36.6,66.54 36.5,66.71 36.39,66.88 36.3,67.05 36.23,67.24 36.36,67.39 36.52,67.5 36.7,67.6 36.87,67.69 37.05,67.79 37.23,67.88 37.59,68.05 37.77,68.14 37.95,68.23 38.12,68.32 38.3,68.42 38.47,68.52 38.65,68.62 38.82,68.72 38.98,68.83 39.15,68.94 39.63,69.31 39.65,69.45 39.34,69.96 39.21,70.05 35.85,68.28 35.67,68.19 35.46,68.53 35.36,68.7 35.29,68.89 35.24,69.08 35.29,69.27 35.42,69.42 35.57,69.55 35.73,69.68 35.88,69.8 36.04,69.92 36.2,70.04 36.37,70.15 36.53,70.27 36.7,70.38 36.87,70.48 38.39,71.45 38.39,71.62 38.19,72.39 38.06,72.37 36.38,71.28 36.04,71.07 35.87,70.96 35.53,70.75 35.18,70.55 35.01,70.45 34.83,70.36 34.65,70.27 34.47,70.28 34.31,70.4 34.18,70.55 34.06,70.71 33.74,71.22 37.04,73.49 37.18,73.61 36.71,74.49 36.55,74.4 34.91,73.26 34.58,73.03 34.41,72.92 34.08,72.7 33.91,72.59 33.74,72.48 33.57,72.38 33.4,72.28 33.21,72.27 33.06,72.4 32.93,72.55 32.81,72.71 32.5,73.22 32.36,73.19 31.9,72.81 31.76,72.68 32.77,71.19 32.89,71.02 33.1,70.68 33.32,70.35 33.42,70.17 33.52,70 33.61,69.83 33.7,69.65 33.75,69.45 33.84,69.28 33.97,69.12 34.11,68.98 34.24,68.83 34.35,68.66 34.45,68.49 34.56,68.32 34.66,68.14 34.76,67.97 34.85,67.8 35.04,67.44 35.14,67.27 35.32,66.91 35.85,65.84 36.03,65.48 36.22,65.12 36.4,64.77 36.59,64.42 36.69,64.24 36.79,64.07 36.93,63.93 37.1,63.82 37.29,63.76
  pour Top (rank 3): 3.11,66.01 3.31,66.04 3.48,66.14 3.62,66.28 3.7,66.47 3.77,66.66 3.65,66.76 2.72,67.14 1.98,67.44 1.25,67.75 0.14,68.22 0.08,68.12 0.08,67.32 0.17,67.18 1.44,66.6 1.62,66.52 1.81,66.44 1.99,66.36 2.18,66.29 2.37,66.22 2.55,66.15 2.74,66.09 2.94,66.04
  pour Top (rank 3): 13.42,67.95 13.5,68.13 13.51,68.32 13.35,68.44 13.18,68.54 13.01,68.64 12.83,68.74 12.48,68.93 12.3,69.02 11.95,69.2 11.59,69.38 11.05,69.65 10.51,69.9 9.97,70.16 9.42,70.41 9.06,70.58 8.69,70.74 8.51,70.82 8.32,70.9 8.14,70.97 7.95,70.95 7.82,70.8 7.72,70.63 7.58,70.25 7.69,70.14 13.12,67.58 13.25,67.67
  pour Top (rank 3): 41.89,67.5 42.08,67.58 42.26,67.66 42.62,67.84 43.16,68.1 43.7,68.36 44.23,68.63 44.77,68.9 45.31,69.17 46.02,69.54 46.37,69.73 46.72,69.91 47.07,70.11 47.25,70.21 47.41,70.32 47.42,70.5 47.35,70.69 47.29,70.88 47.21,71.06 47.13,71.21 44.27,69.78 43.19,69.24 42.12,68.69 41.77,68.51 41.59,68.42 41.51,68.26 41.55,68.07 41.62,67.88 41.7,67.7 41.81,67.53
  pour Top (rank 3): 14.51,70.24 14.76,70.55 14.64,70.66 13.96,71.08 13.44,71.38 12.91,71.67 12.39,71.97 11.69,72.36 9.59,73.51 9.43,73.48 8.87,72.91 8.86,72.79 14.09,69.85 14.24,69.9 14.36,70.06
  pour Top (rank 3): 40.74,69.8 40.92,69.89 41.27,70.07 41.98,70.45 43.03,71.01 43.91,71.49 44.61,71.88 44.96,72.08 45.3,72.28 45.65,72.49 45.82,72.59 45.99,72.7 46.14,72.83 46.23,72.98 45.84,73.67 45.67,73.61 42.7,71.97 41.47,71.29 40.6,70.8 40.42,70.7 40.26,70.59 40.29,70.4 40.34,70.21 40.42,70.02 40.51,69.84
  pour Top (rank 3): 27.4,70.92 27.52,71.08 27.6,70.97 27.75,70.6 27.85,70.51 28.46,71.02 28.46,71.2 28.21,72.17 28.35,72.3 28.99,72.78 29.15,72.9 29.31,73.02 29.46,73.15 29.6,73.29 29.73,73.44 29.69,73.63 29.61,73.81 29.5,73.98 29.29,74.32 29.16,74.25 27.44,72.57 27.3,72.5 25.97,74.25 25.83,74.17 25.27,73.61 25.19,73.46 26.72,71.88 26.78,71.73 26.67,71.56 26.6,71.38 26.61,71.18 26.68,70.99 26.79,70.83 27.04,70.52 27.16,70.58 27.28,70.74
  pour Top (rank 3): 6.72,70.82 6.84,70.98 6.92,71.17 6.99,71.35 7,71.52 3.78,73.13 3.07,73.49 2.53,73.75 2.17,73.93 1.63,74.18 1.26,74.35 0.9,74.52 0.71,74.6 0.53,74.67 0.34,74.74 0.18,74.64 0.1,74.46 0.08,74.26 0.08,73.86 0.23,73.75 3.47,72.18 4.55,71.67 5.27,71.33 5.82,71.07 6.18,70.91 6.36,70.83 6.55,70.76
  pour Top (rank 3): 49.47,71.25 50.36,71.71 50.44,71.86 50.44,72.26 50.43,72.46 50.39,72.65 50.24,72.72 50.05,72.64 49.87,72.56 49.69,72.48 49.51,72.4 49.14,72.22 48.07,71.7 48.02,71.57 48.4,70.86 48.52,70.77 49.41,71.22
  pour Top (rank 3): 15.71,72.35 15.84,72.49 15.91,72.68 15.83,72.86 15.69,73 15.54,73.13 15.39,73.26 15.23,73.38 15.07,73.5 14.91,73.62 14.58,73.85 14.25,74.07 13.91,74.29 13.74,74.4 13.41,74.61 10.86,76.19 10.72,76.07 10.6,75.92 10.47,75.76 10.36,75.59 10.31,75.4 10.47,75.28 10.81,75.07 11.15,74.86 12.17,74.23 13.03,73.71 13.37,73.5 13.71,73.3 14.06,73.1 14.24,73 14.59,72.81 14.76,72.72 14.94,72.63 15.12,72.54 15.3,72.45 15.48,72.37
  pour Top (rank 3): 39.46,72.25 39.64,72.34 39.82,72.44 39.99,72.53 40.52,72.83 41.04,73.12 41.9,73.63 44.65,75.26 44.69,75.41 44.62,75.6 44.48,75.74 44.3,75.82 44.1,75.85 43.9,75.81 43.72,75.74 43.54,75.66 43.35,75.57 43.18,75.48 42.82,75.29 42.47,75.1 42.12,74.9 41.78,74.7 41.44,74.49 39.06,73.01 39.04,72.86 39.11,72.67 39.19,72.49 39.3,72.32
  pour Top (rank 3): 8.26,73.77 8.5,74.09 8.34,74.2 7.83,74.51 7.66,74.61 7.14,74.91 6.44,75.31 5.57,75.8 4.53,76.39 4,76.68 3.65,76.87 3.12,77.15 2.76,77.33 2.4,77.51 2.22,77.59 2.04,77.67 1.85,77.74 1.68,77.64 1.6,77.46 1.58,77.26 1.59,76.86 1.76,76.76 7.87,73.35 8.01,73.42 8.13,73.59
  pour Top (rank 3): 48.94,74.25 50.34,75.02 50.44,75.17 50.44,76.17 50.29,76.11 46.77,74.2 46.79,74.04 47.16,73.34 47.31,73.34 48.71,74.12
  pour Top (rank 3): 23.97,73.58 24.11,73.73 24.36,74.03 24.62,74.34 24.87,74.65 25.38,75.27 26.75,76.99 26.71,77.14 26.28,77.56 26.14,77.47 24.42,75.79 24.28,75.68 21.32,78.37 21.17,78.49 20.78,77.79 20.74,77.63 23.69,74.93 23.72,74.78 23.39,74.28 23.3,74.12 23.56,73.81 23.69,73.66 23.84,73.52
  pour Top (rank 3): 31.65,73.89 31.82,74 31.92,74.11 31.13,74.73 31.25,74.86 34.14,77.63 34.27,77.77 33.76,78.38 33.63,78.49 30.79,75.67 30.65,75.73 28.79,77.55 28.65,77.48 28.22,77.06 28.32,76.9 30.97,73.65 31.11,73.56 31.44,73.77
  pour Top (rank 3): 17.28,74.64 17.41,74.79 17.52,74.96 17.45,75.12 16.79,75.58 15.64,76.38 12.52,78.54 12.37,78.42 11.81,77.86 11.82,77.73 16.79,74.37 16.95,74.33 17.24,74.61
  pour Top (rank 3): 38.36,74.45 38.86,74.79 39.85,75.46 43.16,77.71 43.14,77.88 43.07,78.07 42.98,78.25 42.85,78.4 42.67,78.48 42.48,78.42 42.31,78.33 42.13,78.24 41.96,78.14 41.79,78.03 41.62,77.93 41.45,77.82 41.28,77.71 40.79,77.36 40.3,77.02 39.65,76.56 39.16,76.21 38.84,75.97 37.55,75.02 37.49,74.89 38,74.28 38.16,74.33
  pour Top (rank 3): 9.45,76.06 9.57,76.21 9.65,76.39 9.72,76.58 9.76,76.78 9.65,76.92 9.13,77.23 8.1,77.84 6.72,78.65 6.2,78.95 5.68,79.25 5.33,79.44 4.98,79.63 4.62,79.82 4.26,80 4.08,80.08 3.9,80.17 3.72,80.25 3.53,80.32 3.34,80.36 3.19,80.23 3.1,80.06 3.1,79.86 3.23,79.72 3.39,79.59 3.55,79.47 3.71,79.35 3.87,79.24 4.2,79.01 4.54,78.79 4.71,78.69 5.21,78.37 5.55,78.16 5.9,77.95 6.41,77.65 6.93,77.34 7.45,77.04 7.97,76.74 8.32,76.54 8.67,76.35 9.02,76.16 9.2,76.06
  pour Top (rank 3): 45.82,76.06 46,76.15 46.18,76.24 46.53,76.43 47.05,76.72 47.57,77.02 48.09,77.32 50.16,78.53 50.32,78.65 50.4,79.24 50.42,79.44 50.4,79.64 50.26,79.71 50.08,79.62 49.91,79.53 49.73,79.43 49.38,79.23 48.86,78.94 48.34,78.64 47.83,78.33 47.31,78.02 46.8,77.71 46.29,77.39 45.95,77.17 45.79,77.06 45.62,76.95 45.47,76.83 45.35,76.67 45.28,76.48 45.3,76.28 45.42,76.12 45.58,76.01
  pour Top (rank 3): 0.66,77.89 0.72,78.08 0.75,78.28 0.71,78.47 0.58,78.62 0.4,78.72 0.22,78.69 0.12,78.53 0.08,78.33 0.09,78.13 0.12,77.93 0.19,77.74 0.32,77.61 0.5,77.68 0.63,77.84
  pour Top (rank 3): 27.55,77.81 27.7,77.95 27.84,78.09 27.98,78.23 28.12,78.37 28.4,78.66 28.8,79.1 29.07,79.4 29.34,79.7 31.2,81.79 31.11,81.96 30.68,82.64 30.56,82.56 29.92,81.79 29.79,81.64 29.66,81.49 29.53,81.34 29.39,81.19 29.25,81.05 28.98,80.76 28.69,80.47 28.55,80.33 28.41,80.2 28.26,80.06 27.51,79.4 27.37,79.42 24.46,82.45 24.31,82.38 23.85,81.99 23.77,81.86 25.02,80.56 25.29,80.27 25.56,79.98 25.83,79.68 25.96,79.52 26.21,79.22 26.34,79.06 26.47,78.91 26.59,78.75 26.71,78.59 26.82,78.42 26.94,78.26 27.07,78.11 27.21,77.97 27.36,77.84
  pour Top (rank 3): 11.29,78.76 11.54,79.07 11.4,79.19 5.38,83.13 5.21,83.24 5.02,82.89 4.93,82.71 4.88,82.51 4.9,82.32 5.05,82.19 5.38,81.96 5.71,81.73 6.21,81.4 6.88,80.96 7.88,80.29 10.89,78.32 11.02,78.42 11.14,78.57
  pour Top (rank 3): 20.21,78.89 20.24,79.09 20.21,79.29 20.1,79.46 19.97,79.6 19.83,79.75 19.68,79.89 19.54,80.02 19.24,80.29 18.94,80.56 18.79,80.69 18.49,80.95 18.02,81.33 17.71,81.58 17.4,81.83 17.08,82.07 16.76,82.31 16.44,82.54 16.27,82.66 16.11,82.77 15.94,82.87 15.76,82.98 15.59,83.06 15.42,83.01 15.32,82.83 15.29,82.64 15.37,82.46 15.5,82.31 15.64,82.16 15.78,82.02 15.92,81.88 16.06,81.74 16.36,81.47 16.66,81.2 16.96,80.94 17.26,80.68 17.57,80.43 19.89,78.53 20.04,78.66
  pour Top (rank 3): 35.23,78.52 35.39,78.64 35.54,78.76 35.7,78.89 36,79.15 36.31,79.4 36.61,79.67 36.91,79.93 37.51,80.46 37.97,80.85 38.27,81.11 38.58,81.37 38.89,81.62 39.04,81.75 39.2,81.87 39.36,81.99 39.52,82.11 39.69,82.22 40.04,82.41 39.97,82.56 39.46,83.17 39.3,83.14 38.98,82.91 38.81,82.79 38.66,82.67 38.5,82.55 38.19,82.29 37.88,82.04 37.42,81.66 36.96,81.27 36.5,80.88 34.53,79.19 34.58,79.04 34.71,78.89 34.84,78.74 34.98,78.6 35.15,78.49
  pour Top (rank 3): 44.27,78.53 44.44,78.63 44.79,78.84 45.13,79.05 45.46,79.27 45.8,79.48 46.31,79.81 46.81,80.13 47.31,80.46 47.64,80.69 47.97,80.91 48.47,81.25 48.63,81.37 48.95,81.6 49.28,81.84 49.43,81.96 49.59,82.09 49.75,82.21 49.9,82.34 50.05,82.47 50.18,82.63 50.16,82.82 50.06,83 49.9,83.09 49.71,83.03 49.53,82.94 49.35,82.85 49.18,82.76 49,82.66 48.66,82.46 48.31,82.26 47.97,82.05 47.63,81.84 47.12,81.52 46.62,81.2 43.6,79.23 43.5,79.11 43.75,78.8 43.89,78.66 44.05,78.53
  pour Top (rank 3): 2.35,80.8 2.47,80.96 2.54,81.1 1.52,81.74 1.18,81.95 0.84,82.15 0.66,82.25 0.49,82.35 0.31,82.44 0.15,82.43 0.09,82.23 0.08,82.03 0.08,81.63 0.12,81.46 1.8,80.37 1.96,80.3 2.21,80.61
  pour Top (rank 3): 23.48,82.81 23.79,83.07 23.66,83.21 19.14,87.74 18.99,87.76 18.37,87.25 18.35,87.11 23.12,82.55 23.27,82.64 23.43,82.77
  pour Top (rank 3): 31.94,82.69 31.9,82.89 31.82,83.07 31.72,83.24 31.6,83.4 31.5,83.38 31.54,83.19 31.6,83 31.67,82.81 31.77,82.64
  pour Top (rank 3): 3.95,83.04 4.07,83.19 4.16,83.37 4.23,83.56 4.27,83.76 4.17,83.91 3,84.66 1.48,85.63 0.46,86.27 0.12,86.48 0.08,86.36 0.08,85.36 0.21,85.23 1.89,84.15 2.23,83.94 2.74,83.62 3.08,83.41 3.25,83.31 3.43,83.21 3.6,83.11 3.78,83.02
  pour Top (rank 3): 14.32,83.31 14.5,83.39 14.63,83.54 14.63,83.72 14.5,83.88 14.36,84.02 14.21,84.15 14.07,84.29 13.92,84.42 13.77,84.55 13.46,84.81 13,85.19 12.69,85.44 12.37,85.69 12.06,85.94 11.74,86.18 8.88,88.37 8.72,88.47 8.11,87.96 8.1,87.83 8.39,87.55 8.54,87.42 8.69,87.29 9,87.04 9.32,86.79 9.79,86.42 10.58,85.81 11.37,85.2 11.85,84.84 12.34,84.49 12.67,84.25 12.83,84.14 13.16,83.92 13.33,83.81 13.5,83.7 13.67,83.6 13.84,83.5 14.02,83.4 14.2,83.32
  pour Top (rank 3): 40.97,83.28 41.14,83.39 41.3,83.51 41.62,83.74 42.1,84.11 42.58,84.47 43.37,85.08 45.58,86.8 46.53,87.53 46.66,87.67 46.62,87.87 46.56,88.06 46.47,88.24 46.33,88.38 46.14,88.41 45.97,88.31 45.81,88.19 45.64,88.08 45.16,87.72 44.68,87.36 44.05,86.87 43.57,86.5 43.1,86.13 40.27,83.91 40.34,83.76 40.47,83.61 40.6,83.45 40.74,83.32
  pour Top (rank 3): 37.67,87.99 37.83,88.1 37.99,88.23 38.3,88.48 38.61,88.74 39.06,89.13 39.52,89.52 39.97,89.91 40.42,90.31 40.72,90.57 41.02,90.84 41.46,91.25 41.75,91.52 41.89,91.66 42.18,91.94 42.32,92.08 42.46,92.23 42.59,92.37 42.73,92.52 42.85,92.68 42.96,92.85 42.93,93.04 42.84,93.22 42.69,93.35 42.51,93.27 42.34,93.17 42.17,93.05 42.01,92.94 41.85,92.82 41.54,92.57 41.22,92.32 40.92,92.06 40.61,91.81 40.16,91.41 39.71,91.01 37.03,88.61 37.14,88.45 37.27,88.3 37.41,88.15 37.56,88.02
  pour Top (rank 3): 7.38,88.54 7.54,88.66 7.64,88.83 7.78,89.2 4.56,91.58 4.08,91.94 3.59,92.29 3.11,92.64 2.78,92.87 2.29,93.22 1.96,93.44 1.63,93.67 1.46,93.78 1.29,93.88 1.12,93.98 0.93,94.05 0.74,94.09 0.7,93.93 0.7,93.33 0.75,93.16 3.95,90.76 4.43,90.4 4.92,90.04 5.57,89.58 5.89,89.34 6.22,89.12 6.55,88.89 6.72,88.78 6.89,88.67 7.06,88.57
  pour Top (rank 3): 47.75,88.51 47.93,88.61 48.1,88.71 48.27,88.81 48.61,89.03 48.77,89.14 49.11,89.36 50.42,90.27 50.44,90.46 50.44,91.46 50.3,91.4 48.97,90.5 48.65,90.27 48.48,90.15 48.16,89.92 48,89.8 47.84,89.68 47.68,89.55 47.53,89.43 47.38,89.29 47.28,89.12 47.26,88.92 47.32,88.73 47.45,88.58 47.62,88.48
  pour Top (rank 3): 12.99,92.54 13.15,92.66 13.29,92.79 13.04,93.1 12.9,93.25 12.75,93.37 12.57,93.46 12.38,93.42 12.24,93.28 12.14,93.11 12,92.74 12.08,92.6 12.59,92.29 12.75,92.34 12.91,92.46
  pour Top (rank 3): 11.38,93.71 11.48,93.88 11.51,94.08 11.48,94.28 11.37,94.44 11.23,94.58 11.08,94.72 10.94,94.85 10.64,95.12 10.18,95.51 9.72,95.9 9.26,96.28 8.79,96.65 8.32,97.03 5.02,99.62 4.87,99.61 4.58,99.33 4.45,99.18 4.34,99.01 4.38,98.85 5.33,98.11 7.38,96.52 8.17,95.9 8.8,95.4 9.42,94.91 9.89,94.53 10.2,94.27 11.11,93.49 11.25,93.58
  pour Top (rank 3): 46.76,95.8 48.98,97.51 50.09,98.37 50.23,98.51 50.34,98.68 50.41,98.86 50.44,99.06 50.41,99.26 50.35,99.44 50.2,99.5 50.03,99.41 49.86,99.3 49.69,99.19 49.36,98.97 49.03,98.73 48.55,98.38 48.07,98.02 47.43,97.54 46.8,97.05 46.01,96.43 45.07,95.69 44.45,95.19 44.14,94.93 43.83,94.68 43.68,94.55 43.52,94.42 43.48,94.25 43.54,94.06 43.61,93.87 43.75,93.5 43.9,93.6 46.6,95.67
  pour Top (rank 3): 0.79,97.73 0.89,97.9 0.99,98.08 1.09,98.25 1.18,98.43 1.27,98.61 1.32,98.8 1.22,98.97 1.06,99.1 0.87,99.14 0.68,99.09 0.5,99 0.34,98.88 0.19,98.75 0.08,98.6 0.09,96.6 0.19,96.76 0.61,97.44
  pour Top (rank 3): 3.82,99.99 3.94,100.14 4.02,100.3 3.09,101.05 3.1,101.2 6.26,105.58 6.13,105.73 5.72,106.16 5.58,106.29 5.07,105.67 4.95,105.51 4.83,105.35 4.71,105.18 4.6,105.02 4.37,104.69 4.03,104.2 3.7,103.7 3.38,103.19 3.27,103.03 3.04,102.69 2.93,102.53 2.81,102.37 2.7,102.2 2.58,102.04 2.45,101.89 2.32,101.74 2.13,101.8 1.96,101.9 1.8,102.02 1.64,102.13 1.48,102.25 1.32,102.37 0.22,103.25 0.18,103.09 0.06,102.3 0.04,102.11 1.59,100.84 1.54,100.66 1.46,100.47 1.41,100.28 1.42,100.08 1.5,99.9 1.67,99.8 1.87,99.8 2.06,99.87 2.22,99.99 2.38,100.11 2.53,100.17 3.33,99.57 3.48,99.54 3.72,99.86
  pour Top (rank 3): 50.4,104.25 50.46,104.85 50.41,105.03 50.08,105.53 49.97,105.7 49.84,105.85 49.71,106 49.56,106.14 49.38,106.21 49.21,106.11 49.09,105.95 49.01,105.77 48.94,105.58 48.95,105.41 50.23,103.62 50.32,103.55 50.38,104.14
  pour Top (rank 3): 7.08,106.74 7.21,106.88 7.34,107.04 7.46,107.2 7.71,107.51 8.06,108 8.29,108.32 8.64,108.81 10.24,111.11 10.31,111.27 9.8,111.89 9.67,111.84 9.16,111.22 9.04,111.06 8.79,110.75 8.55,110.43 8.32,110.1 8.08,109.78 7.85,109.45 7.51,108.96 6.37,107.32 6.45,107.17 6.59,107.03 6.73,106.89 6.9,106.78
  pour Top (rank 3): 48.39,107.02 48.51,107.18 48.56,107.37 48.51,107.56 48.4,107.73 48.17,108.06 47.49,109.05 46.91,109.86 45.41,111.99 45.27,111.88 44.7,111.31 44.74,111.16 46.01,109.36 46.47,108.71 46.83,108.22 47.06,107.9 47.3,107.58 47.42,107.42 47.55,107.26 47.68,107.11 47.94,106.81 48.08,106.76 48.23,106.89
  pour Top (rank 3): 11.2,112.27 11.36,112.38 11.51,112.52 11.64,112.67 11.75,112.84 11.78,113.03 11.64,113.17 11.47,113.27 11.28,113.34 11.08,113.34 10.89,113.31 10.71,113.22 10.55,113.1 10.4,112.97 10.34,112.84 10.59,112.53 10.73,112.39 10.89,112.26
  pour Top (rank 3): 44.22,112.22 44.4,112.3 44.56,112.42 44.63,112.6 44.6,112.8 44.51,112.98 44.38,113.14 44.1,113.42 43.95,113.5 43.2,113.22 43.3,113.05 43.51,112.71 43.63,112.55 43.77,112.4 43.93,112.28 44.11,112.21
  pour Top (rank 3): 13.17,114.77 13.77,115.57 13.78,115.76 13.79,117.17 13.75,117.23 12.67,115.79 12.55,115.63 12.32,115.3 12.1,114.97 11.99,114.8 11.88,114.63 11.8,114.45 11.88,114.27 11.99,114.11 12.13,113.97 12.27,113.83 12.41,113.77 13.01,114.57
  pour Top (rank 3): 42.94,114.11 43.08,114.25 43.13,114.44 43.06,114.62 42.97,114.8 42.87,114.97 42.76,115.14 42.65,115.31 42.54,115.47 42.42,115.64 42.3,115.79 41.44,116.9 41.31,116.9 40.74,116.33 40.7,116.19 41.58,115.1 41.71,114.95 41.84,114.8 41.98,114.65 42.12,114.51 42.26,114.37 42.41,114.24 42.57,114.11 42.74,114.02
  pour Top (rank 3): 14.96,117.95 15.36,117.95 15.54,118 16.71,119.37 16.83,119.52 16.96,119.68 17.09,119.84 17.21,119.99 17.33,120.15 17.45,120.32 17.56,120.48 17.67,120.65 17.76,120.83 17.76,121.02 17.66,121.19 17.51,121.33 17.34,121.44 17.18,121.48 16.81,121.01 16.69,120.86 16.43,120.55 16.18,120.24 15.54,119.47 14.24,117.95 14.84,117.95
  pour Top (rank 3): 40.02,117.95 40.42,117.95 40.43,118.05 39.39,119.53 39.16,119.85 38.93,120.18 38.81,120.34 38.56,120.65 38.44,120.81 38.31,120.97 38.18,121.12 38.03,121.25 37.88,121.38 37.74,121.39 37.23,120.77 37.34,120.61 39.24,118.04 39.39,117.95 39.79,117.95
  pour Top (rank 3): 36.98,121.85 37.1,122.01 37.18,122.19 37.13,122.37 36.94,122.4 36.75,122.34 36.61,122.2 36.52,122.02 36.48,121.82 36.48,121.62 36.48,121.42 36.56,121.42 36.84,121.71